# Altium PCB RasPi_Hat_Temp.PcbDoc
Units mm, origin at the board's own origin, x right, y up, seen from the top; angles counter-clockwise.
Board outline 61.34 x 65.02 mm, 2 copper layers (Top Layer, Bottom Layer), stack 0.325 mm thick; 5 components, 35 nets, 140 pads, 0 vias.
Unrouted connection lines stored in the file: 1.
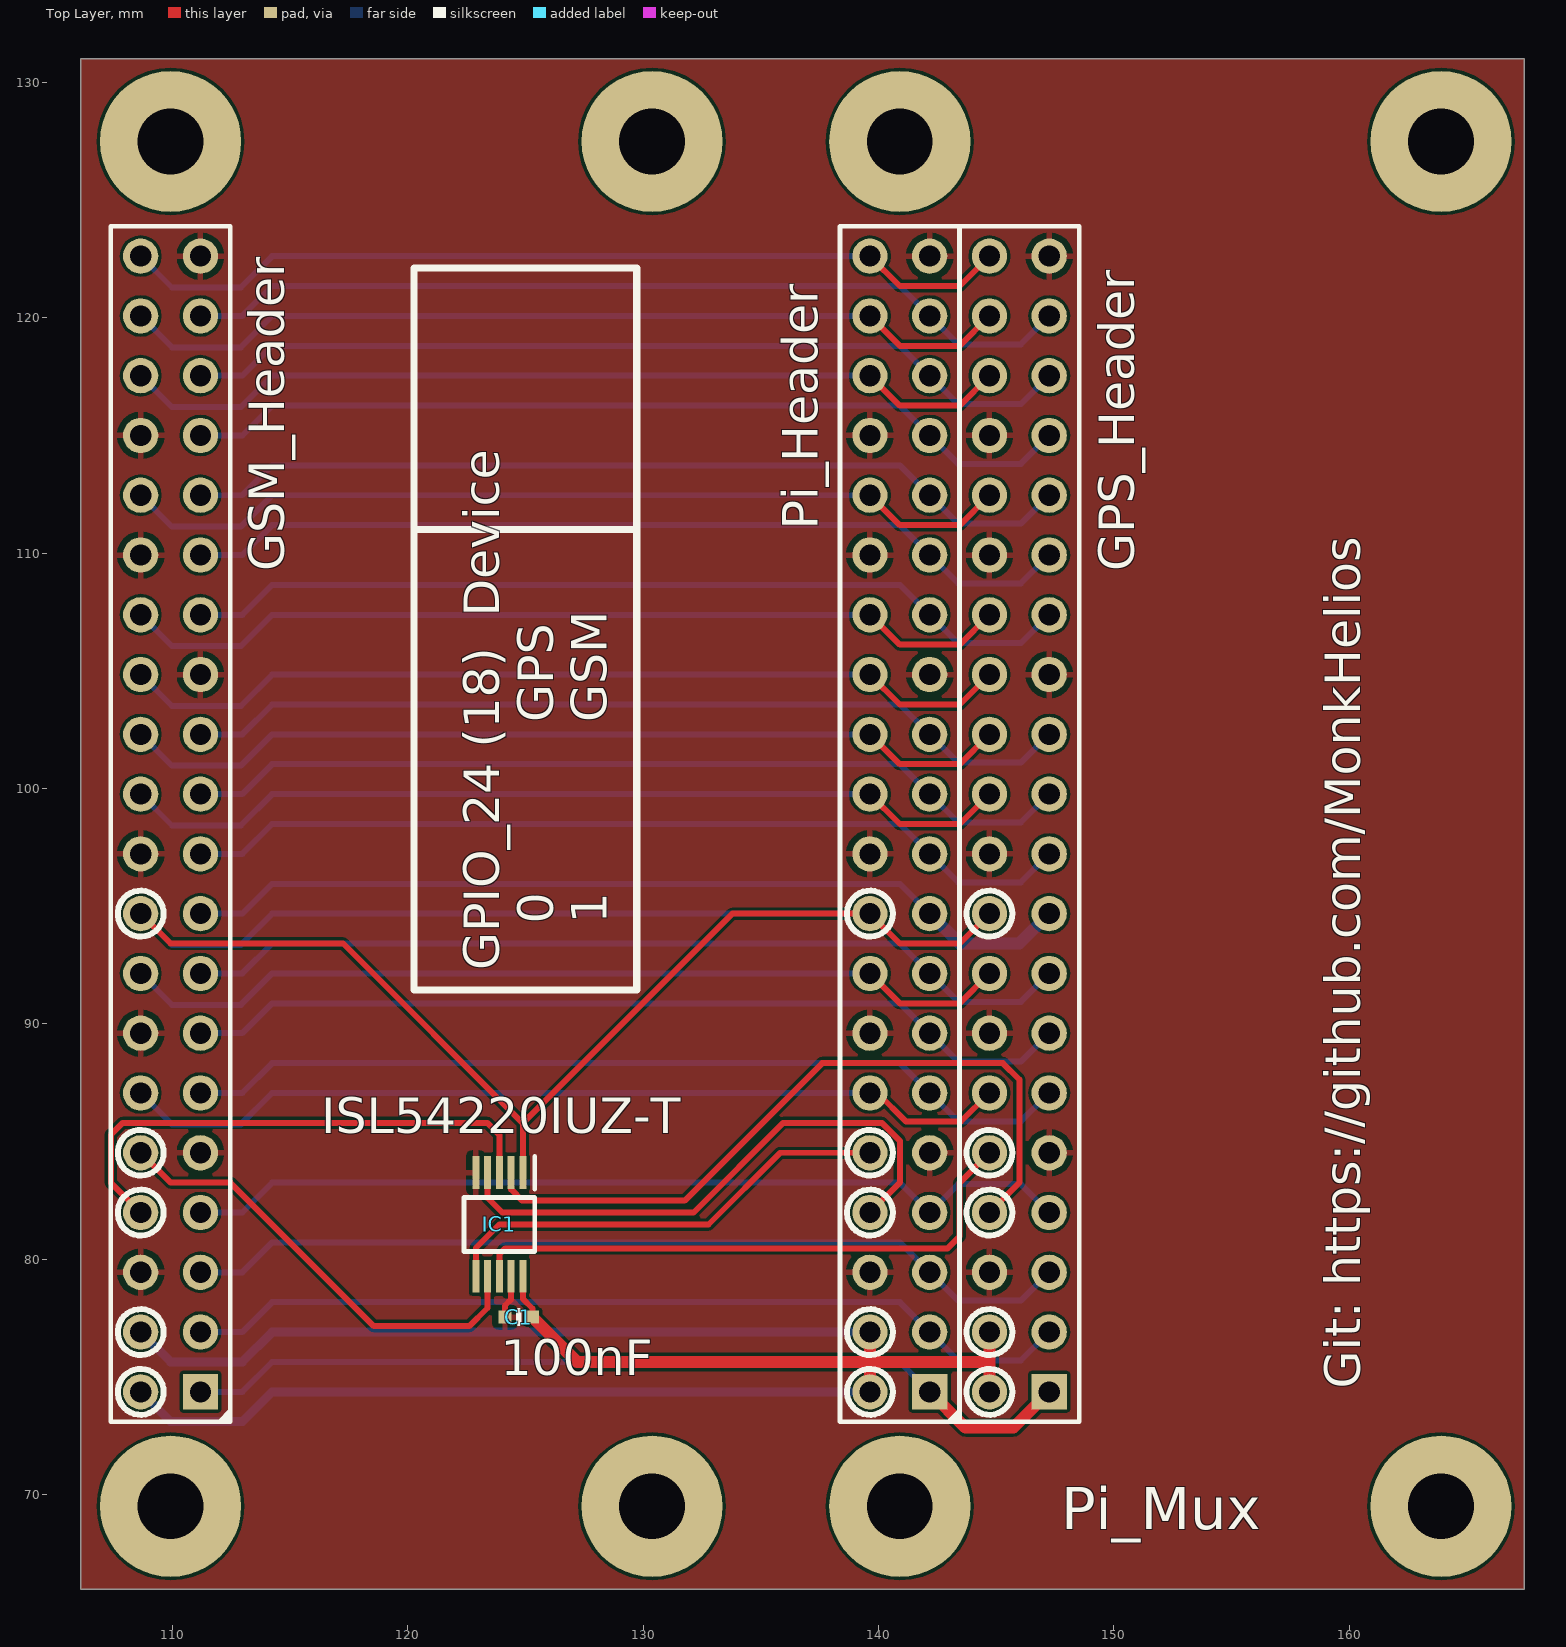
[diagram p0: Top Layer view]
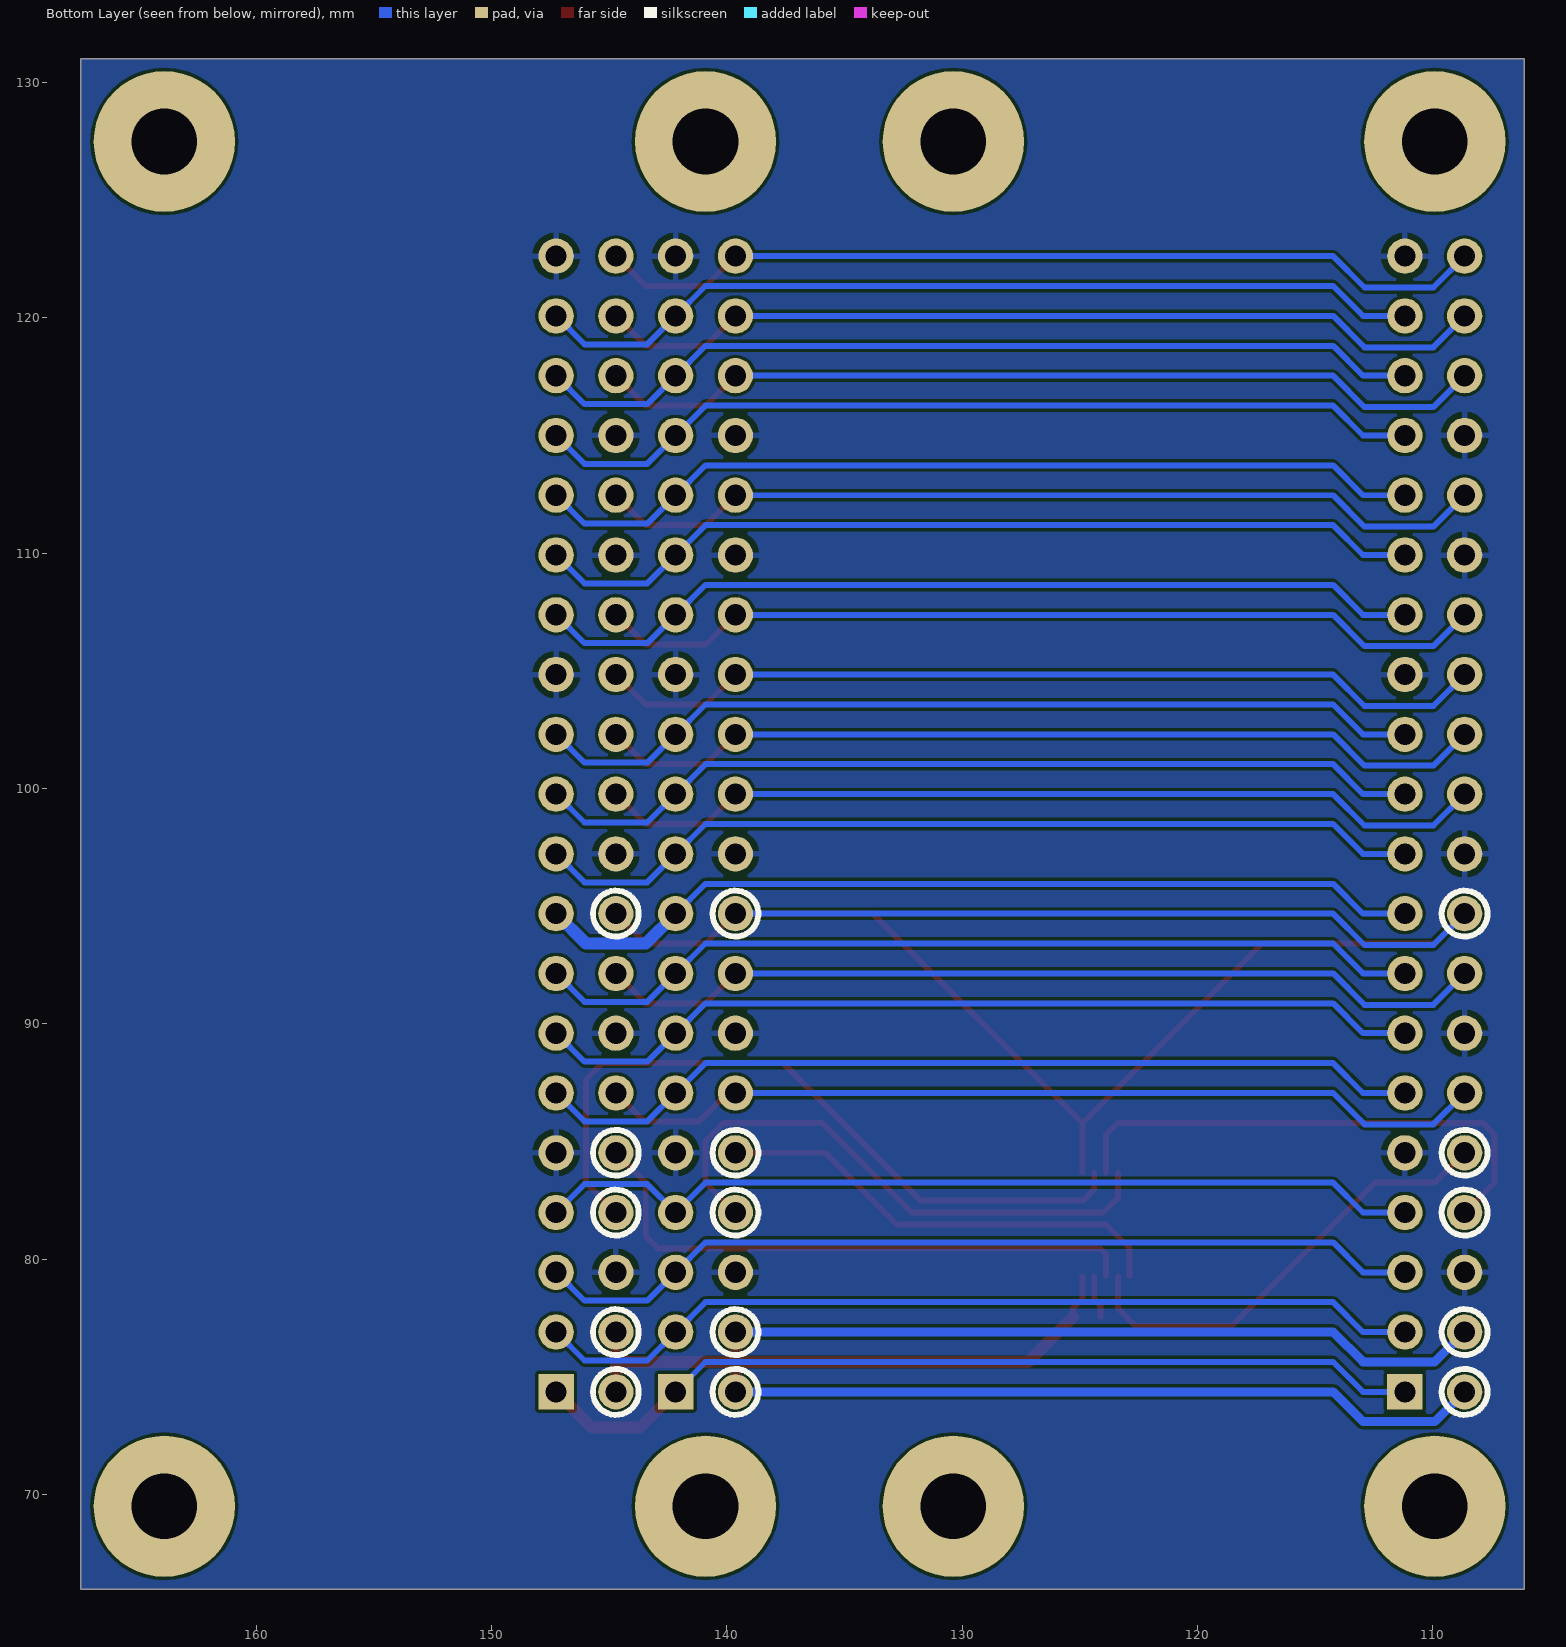
[diagram p1: Bottom Layer view, seen from below]

## Layer stack, top to bottom
Top Solder: solder mask 0.0102, Solder Resist, Dk 3.5
Top Layer: signal copper 0.0356
Dielectric 1: core 0.254, FR-4, Dk 4.2
Bottom Layer: signal copper 0.0356
Bottom Solder: solder mask 0.0102, Solder Resist, Dk 3.5

## Board outline
167.45,131 167.45,65.977 106.108,65.977 106.108,131

## Design rules (kind name [scope] priority, off if disabled: settings)
Clearance [All] p1: gap=0.127 ignorepadtopadclearanceinfootprint=FALSE
ComponentClearance [All] p1: gap=0 collisioncheckmode=3 verticalgap=0 showdistances=FALSE
PlaneConnect [All] p1: pad.planeconnectstyle=Relief pad.reliefexpansion=0.508 pad.reliefentries=4 pad.reliefconductorwidth=0.254 pad.reliefairgap=0.254 via.planeconnectstyle=Direct via.reliefexpansion=0.508 via.reliefentries=4 via.reliefconductorwidth=0.254 via.reliefairgap=0.254
PolygonConnect PolygonConnect_3 [All vs IsNamedPolygon('gnd_bottom')] p1: thpad.connectstyle=Relief thpad.reliefconductorwidth=0.254 thpad.reliefentries=4 thpad.polygonreliefangle="90 Angle" thpad.airgapwidth=0.254 smdpad.connectstyle=Direct smdpad.reliefconductorwidth=0.254 smdpad.reliefentries=4 smdpad.polygonreliefangle="90 Angle" smdpad.airgapwidth=0.254 via.connectstyle=Direct via.reliefconductorwidth=0.254 via.reliefentries=4 via.polygonreliefangle="90 Angle" via.airgapwidth=0.254
PolygonConnect PolygonConnect_2 [All vs IsNamedPolygon('gnd_top')] p2: connectstyle=Relief reliefconductorwidth=0.254 reliefentries=4 polygonreliefangle="90 Angle" airgapwidth=0.254
PolygonConnect PolygonConnect_1 [All vs IsNamedPolygon('gnd_top')] p3: thpad.connectstyle=Relief thpad.reliefconductorwidth=0.254 thpad.reliefentries=4 thpad.polygonreliefangle="90 Angle" thpad.airgapwidth=0.254 smdpad.connectstyle=Direct smdpad.reliefconductorwidth=0.254 smdpad.reliefentries=4 smdpad.polygonreliefangle="90 Angle" smdpad.airgapwidth=0.254 via.connectstyle=Direct via.reliefconductorwidth=0.254 via.reliefentries=4 via.polygonreliefangle="90 Angle" via.airgapwidth=0.254
PolygonConnect [All] p4: thpad.connectstyle=Relief thpad.reliefconductorwidth=0.254 thpad.reliefentries=4 thpad.polygonreliefangle="90 Angle" thpad.airgapwidth=0.254 smdpad.connectstyle=Relief smdpad.reliefconductorwidth=0.254 smdpad.reliefentries=4 smdpad.polygonreliefangle="90 Angle" smdpad.airgapwidth=0.254 via.connectstyle=Direct via.reliefconductorwidth=0.254 via.reliefentries=4 via.polygonreliefangle="90 Angle" via.airgapwidth=0.254
RoutingVias [All] p1: holewidth=0.711 width=1.27 viastyle="Through Hole" minholewidth=0.711 minwidth=1.27 maxholewidth=0.711 maxwidth=1.27
SolderMaskExpansion [All] p1: expansion=0.102
UnRoutedNet [All] p1: checkbadconnections=TRUE
Width [All] p1: maxlimit=1.27 minlimit=0.152 preferedwidth=0.305
27 further rules are at their usual default settings.

## Components (designator, comment, footprint, x,y, rotation, side; value= is the part's Value field where it differs from the comment)
C1 "100nF" SMD-0402C 124.714,77.534 r270 top
GPS_Header "Header 20X2" HDR2X20 147.256,74.358 r90 top
GSM_Header "Header 20X2" HDR2X20 111.188,74.358 r90 top
IC1 "ISL54220IUZ-T" SOP50P490X110-10N 123.888,81.471 r270 top
Pi_Header "Header 20X2" HDR2X20 142.177,74.358 r90 top

## Footprints (in the part's own frame and the unit in brackets; to place one, negate y for a bottom-side part, rotate by r counter-clockwise, add the part's x,y. Pads: shape width x height; smd on the part's side, far side on the other; paste and mask are expansions set on the pad)
HDR2X20 [mm] "Connector; Header; 20x2 Position"
  rect 1.5x1.5 hole 0.9: 1(0,0)
  round 1.5 hole 0.9: 2(0,2.54) 3(2.54,0) 4(2.54,2.54) 5(5.08,0) 6(5.08,2.54) 7(7.62,0) 8(7.62,2.54) 9(10.16,0) 10(10.16,2.54) 11(12.7,0) 12(12.7,2.54) 13(15.24,0) 14(15.24,2.54) 15(17.78,0) 16(17.78,2.54) 17(20.32,0) 18(20.32,2.54) 19(22.86,0) 20(22.86,2.54) 21(25.4,0) 22(25.4,2.54) 23(27.94,0) 24(27.94,2.54) 25(30.48,0) 26(30.48,2.54) 27(33.02,0) 28(33.02,2.54) 29(35.56,0) 30(35.56,2.54) 31(38.1,0) 32(38.1,2.54) 33(40.64,0) 34(40.64,2.54) 35(43.18,0) 36(43.18,2.54) 37(45.72,0) 38(45.72,2.54) 39(48.26,0) 40(48.26,2.54)
  silkscreen extent -1.27,-1.27 49.53,3.81
SMD-0402C [mm]
  rect 0.55x0.55 smd: 1(0,0.584) 2(0,-0.584)
  silkscreen extent -0.25,0 0.25,0, body extent -0.25,-0.51 0.25,0.51, height 0.51
SOP50P490X110-10N [mm]
  rect 1.4x0.3 smd: 1(-2.2,1) 2(-2.2,0.5) 3(-2.2,0) 4(-2.2,-0.5) 5(-2.2,-1) 6(2.2,-1) 7(2.2,-0.5) 8(2.2,0) 9(2.2,0.5) 10(2.2,1)
  silkscreen extent -2.9,-1.5 1.15,1.5, body extent -2.45,-1.5 2.45,1.5, height 1.1

## Part data
C1: library part GCM155C71A105KE38D, "CAP CER 1UF 10V X7S 0402", Digi-Key Part Number=490-13409-1-ND, Manufacturer="Murata Electronics North America", Operating Temperature="-55°C ~ 125°C", Package / Case="0402 (1005 Metric)", Ratings=AEC-Q200, Temperature Coefficient=X7S, Tolerance=±10%, Voltage=10V, @ qty=0, Applications=Automotive, Datasheets=http://www.murata.com/~/media/webrenewal/support/library/catalog/products/capacitor/mlcc/c03e.ashx, Factory Stock=0, Features=-, Height - Seated (Max)=-, Image=//media.digikey.com/Renders/Murata%20Renders/ZRB-SERIES-0402.jpg, Lead Spacing=-, Lead Style=-, Minimum Quantity=1, Mounting Type="Surface Mount, MLCC", Packaging="Cut Tape (CT)", Part Number=GCM155C71A105KE38D, Part Status=Active, Quantity Available=7240, Series=GCM, Size / Dimension="0.039\" L x 0.020\" W (1.00mm x 0.50mm)", Thickness (Max)="0.022\" (0.55mm)", Unit Price (USD)=0.12
GPS_Header GSM_Header Pi_Header: "Header, 20-Pin, Dual row", LatestRevisionDate=17-Jul-2002, LatestRevisionNote="Re-released for DXP Platform.", Publisher="Altium Limited"
IC1: "Integrated Circuit", Manufacturer_Name="Renesas / Intersil", Mouser Part Number=968-ISL54220IUZ-T, Datasheet Link=https://www.renesas.com/kr/en/www/doc/datasheet/isl54220.pdf, Height=1.1mm, Manufacturer_Part_Number=ISL54220IUZ-T, Mouser Price/Stock=https://www.mouser.com/Search/Refine.aspx?Keyword=968-ISL54220IUZ-T

## Free pads (board coordinates)
  round 6 hole 2.794 unplated: 77(109.918,69.495) 77(140.906,69.495) 78(109.918,127.49) 78(140.906,127.49) 79(130.378,127.49) 79(163.906,127.49) 80(130.378,69.495) 80(163.906,69.495)

## Nets (pads, with @x,y where several pads share a name; then routed paths per layer and width w, separated by ;. In a path a pad name is that pad's centre, name@x,y a point inside that pad or via, vN(x,y) a via of type N, cw(c..) or ccw(c..) an arc to the next point about the centre after c; other vN are vias at no path point)
3: GPS_Header.3 GSM_Header.3 Pi_Header.3 | length 38.1
  Bottom Layer w0.254: GSM_Header.3 112.966,76.898 114.236,78.168 140.906,78.168 Pi_Header.3 143.383,75.692 146.05,75.692 GPS_Header.3
3V3: GPS_Header.1 GPS_Header.17 GSM_Header.1 GSM_Header.17 Pi_Header.1 Pi_Header.17 | length 76.6
  Top Layer w0.508: Pi_Header.1 143.701,72.834 145.732,72.834 GPS_Header.1
  Bottom Layer w0.254: GSM_Header.1 112.966,74.358 114.236,75.629 140.906,75.629 Pi_Header.1 ; GSM_Header.17 112.966,94.678 114.236,95.948 140.906,95.948 Pi_Header.17
  Bottom Layer w0.508: Pi_Header.17 143.446,93.408 145.987,93.408 GPS_Header.17
5: GPS_Header.5 GSM_Header.5 Pi_Header.5 | length 38.1
  Bottom Layer w0.254: GSM_Header.5 112.966,79.438 114.236,80.709 140.906,80.709 Pi_Header.5 143.383,78.232 146.05,78.232 GPS_Header.5
5V: C1.1 GPS_Header.2 GPS_Header.4 GSM_Header.2 GSM_Header.4 IC1.10 Pi_Header.2 Pi_Header.4 | length 91.3
  Top Layer w0.254: IC1.10 124.889,78.311 125.298,77.902 C1.1
  Top Layer w0.508: C1.1 125.298,77.521 127.191,75.629 139.636,75.629 ; Pi_Header.2 139.636,75.629 ; Pi_Header.4 139.636,75.629 ; GPS_Header.2 144.716,75.629 ; GPS_Header.4 144.716,75.629 ; 139.636,75.629 144.716,75.629
  Bottom Layer w0.381: GSM_Header.2 109.918,73.088 112.966,73.088 114.236,74.358 Pi_Header.2 ; GSM_Header.4 109.918,75.629 112.966,75.629 114.236,76.898 Pi_Header.4
7: GPS_Header.7 GSM_Header.7 Pi_Header.7 | length 38.1
  Bottom Layer w0.254: GSM_Header.7 112.966,81.978 114.236,83.248 140.906,83.248 Pi_Header.7 143.383,83.185 146.05,83.185 GPS_Header.7
11: GPS_Header.11 GSM_Header.11 Pi_Header.11 | length 38.1
  Bottom Layer w0.254: GSM_Header.11 112.966,87.058 114.236,88.328 140.906,88.328 Pi_Header.11 143.383,85.852 146.05,85.852 GPS_Header.11
12: GPS_Header.12 GSM_Header.12 Pi_Header.12 | length 38.2
  Top Layer w0.254: Pi_Header.12 139.96,87.058 141.167,85.852 143.51,85.852 GPS_Header.12
  Bottom Layer w0.254: GSM_Header.12 109.982,85.725 112.903,85.725 114.236,87.058 Pi_Header.12
13: GPS_Header.13 GSM_Header.13 Pi_Header.13 | length 38.1
  Bottom Layer w0.254: GSM_Header.13 112.966,89.599 114.236,90.868 140.906,90.868 Pi_Header.13 143.383,88.392 146.05,88.392 GPS_Header.13
15: GPS_Header.15 GSM_Header.15 Pi_Header.15 | length 38.1
  Bottom Layer w0.254: GSM_Header.15 112.966,92.138 114.236,93.408 140.906,93.408 Pi_Header.15 143.383,90.932 146.05,90.932 GPS_Header.15
16: GPS_Header.16 GSM_Header.16 Pi_Header.16 | length 38.2
  Top Layer w0.254: Pi_Header.16 140.906,90.868 143.446,90.868 GPS_Header.16
  Bottom Layer w0.254: GSM_Header.16 109.982,90.805 112.903,90.805 114.236,92.138 Pi_Header.16
18: GPS_Header.18 GSM_Header.18 IC1.1 Pi_Header.18 | length 78.7
  Top Layer w0.254: GSM_Header.18 109.918,93.408 117.253,93.408 124.889,85.773 ; IC1.1 124.889,85.773 ; GPS_Header.18 143.446,93.408 140.906,93.408 Pi_Header.18 133.794,94.678 124.889,85.773
  Bottom Layer w0.254: GSM_Header.18 109.982,93.345 112.903,93.345 114.236,94.678 Pi_Header.18
19: GPS_Header.19 GSM_Header.19 Pi_Header.19 | length 38.1
  Bottom Layer w0.254: GSM_Header.19 112.966,97.218 114.236,98.489 140.906,98.489 Pi_Header.19 143.383,96.012 146.05,96.012 GPS_Header.19
21: GPS_Header.21 GSM_Header.21 Pi_Header.21 | length 38.1
  Bottom Layer w0.254: GSM_Header.21 112.966,99.758 114.236,101.028 140.906,101.028 Pi_Header.21 143.383,98.552 146.05,98.552 GPS_Header.21
22: GPS_Header.22 GSM_Header.22 Pi_Header.22 | length 38.2
  Top Layer w0.254: Pi_Header.22 140.906,98.489 143.446,98.489 GPS_Header.22
  Bottom Layer w0.254: GSM_Header.22 109.982,98.425 112.903,98.425 114.236,99.758 Pi_Header.22
23: GPS_Header.23 GSM_Header.23 Pi_Header.23 | length 38.1
  Bottom Layer w0.254: GSM_Header.23 112.966,102.298 114.236,103.569 140.906,103.569 Pi_Header.23 143.383,101.092 146.05,101.092 GPS_Header.23
24: GPS_Header.24 GSM_Header.24 Pi_Header.24 | length 38.2
  Top Layer w0.254: Pi_Header.24 140.906,101.028 143.446,101.028 GPS_Header.24
  Bottom Layer w0.254: GSM_Header.24 109.982,100.965 112.903,100.965 114.236,102.298 Pi_Header.24
26: GPS_Header.26 GSM_Header.26 Pi_Header.26 | length 38.2
  Top Layer w0.254: Pi_Header.26 140.906,103.569 143.446,103.569 GPS_Header.26
  Bottom Layer w0.254: GSM_Header.26 109.982,103.505 112.903,103.505 114.236,104.838 Pi_Header.26
27: GPS_Header.27 GSM_Header.27 Pi_Header.27 | length 38.1
  Bottom Layer w0.254: GSM_Header.27 112.966,107.379 114.236,108.648 140.906,108.648 Pi_Header.27 143.383,106.172 146.05,106.172 GPS_Header.27
28: GPS_Header.28 GSM_Header.28 Pi_Header.28 | length 38.2
  Top Layer w0.254: Pi_Header.28 140.906,106.108 143.446,106.108 GPS_Header.28
  Bottom Layer w0.254: GSM_Header.28 109.982,106.045 112.903,106.045 114.236,107.379 Pi_Header.28
29: GPS_Header.29 GSM_Header.29 Pi_Header.29 | length 38.1
  Bottom Layer w0.254: GSM_Header.29 112.966,109.918 114.236,111.188 140.906,111.188 Pi_Header.29 143.383,108.712 146.05,108.712 GPS_Header.29
31: GPS_Header.31 GSM_Header.31 Pi_Header.31 | length 38.1
  Bottom Layer w0.254: GSM_Header.31 112.966,112.459 114.236,113.728 140.906,113.728 Pi_Header.31 143.383,111.252 146.05,111.252 GPS_Header.31
32: GPS_Header.32 GSM_Header.32 Pi_Header.32 | length 38.2
  Top Layer w0.254: Pi_Header.32 140.906,111.188 143.446,111.188 GPS_Header.32
  Bottom Layer w0.254: GSM_Header.32 109.982,111.125 112.903,111.125 114.236,112.459 Pi_Header.32
33: GPS_Header.33 GSM_Header.33 Pi_Header.33 | length 38.1
  Bottom Layer w0.254: GSM_Header.33 112.966,114.998 114.236,116.268 140.906,116.268 Pi_Header.33 143.383,113.792 146.05,113.792 GPS_Header.33
35: GPS_Header.35 GSM_Header.35 Pi_Header.35 | length 38.1
  Bottom Layer w0.254: GSM_Header.35 112.966,117.538 114.236,118.808 140.906,118.808 Pi_Header.35 143.383,116.332 146.05,116.332 GPS_Header.35
36: GPS_Header.36 GSM_Header.36 Pi_Header.36 | length 38.2
  Top Layer w0.254: Pi_Header.36 140.906,116.268 143.446,116.268 GPS_Header.36
  Bottom Layer w0.254: GSM_Header.36 109.982,116.205 112.903,116.205 114.236,117.538 Pi_Header.36
37: GPS_Header.37 GSM_Header.37 Pi_Header.37 | length 38.1
  Bottom Layer w0.254: GSM_Header.37 112.966,120.078 114.236,121.349 140.906,121.349 Pi_Header.37 143.383,118.872 146.05,118.872 GPS_Header.37
38: GPS_Header.38 GSM_Header.38 Pi_Header.38 | length 38.2
  Top Layer w0.254: Pi_Header.38 140.906,118.808 143.446,118.808 GPS_Header.38
  Bottom Layer w0.254: GSM_Header.38 109.982,118.745 112.903,118.745 114.236,120.078 Pi_Header.38
40: GPS_Header.40 GSM_Header.40 Pi_Header.40 | length 38.2
  Top Layer w0.254: Pi_Header.40 140.906,121.349 143.446,121.349 GPS_Header.40
  Bottom Layer w0.254: GSM_Header.40 109.982,121.285 112.903,121.285 114.236,122.618 Pi_Header.40
GND: C1.2 GPS_Header.6 GPS_Header.9 GPS_Header.14 GPS_Header.20 GPS_Header.25 GPS_Header.30 GPS_Header.34 GPS_Header.39 GSM_Header.6 GSM_Header.9 GSM_Header.14 GSM_Header.20 GSM_Header.25 GSM_Header.30 GSM_Header.34 GSM_Header.39 IC1.5 IC1.9 Pi_Header.6 Pi_Header.9 Pi_Header.14 Pi_Header.20 Pi_Header.25 Pi_Header.30 Pi_Header.34 Pi_Header.39 | length 1.8
  Top Layer w0.254: C1.2 124.13,78.029 124.388,78.287 IC1.9
GPS_RX: GPS_Header.8 IC1.2 | length 31.4
  Top Layer w0.254: IC1.2 124.388,82.961 124.863,82.486 131.762,82.486 137.605,88.328 145.288,88.328 145.987,87.63 145.987,83.248 GPS_Header.8
GPS_TX: GPS_Header.10 IC1.8 | length 24.9
  Top Layer w0.254: IC1.8 123.888,80.2 124.142,80.454 142.939,80.454 143.446,80.962 143.446,83.248 GPS_Header.10
GSM_RX: GSM_Header.8 IC1.3 | length 22.4
  Top Layer w0.254: GSM_Header.8 107.379,83.248 107.379,85.281 107.886,85.788 123.38,85.788 123.888,85.281 IC1.3
GSM_TX: GSM_Header.10 IC1.7 | length 19.5
  Top Layer w0.254: GSM_Header.10 109.918,83.248 112.459,83.248 118.554,77.153 122.618,77.153 123.389,77.923 IC1.7
Pi_RX: IC1.6 Pi_Header.10 | length 19.6
  Top Layer w0.254: IC1.6 122.888,80.47 123.888,81.471 132.779,81.471 135.826,84.519 Pi_Header.10
Pi_TX: IC1.4 Pi_Header.8 | length 24.3
  Top Layer w0.254: IC1.4 123.389,82.605 124.015,81.978 132.143,81.978 135.953,85.788 140.144,85.788 140.906,85.026 140.906,83.248 Pi_Header.8

## Polygon pours and split planes (outlines as drawn)
GND on Top Layer "gnd_top" (solid, pour order 0): 167.45,131 106.108,131 106.108,65.977 167.45,65.977
GND on Bottom Layer "gnd_bottom" (solid, pour order 2): 167.45,131 106.108,131 106.108,65.977 167.45,65.977

## Silkscreen, mask and mechanical layers (free items; w line width, h text height)
Top Overlay:
  circle w0.254: c108.648,94.678 r0.975
  circle w0.254: c108.648,84.519 r0.975
  circle w0.254: c108.648,81.978 r0.975
  circle w0.254: c139.636,94.678 r0.975
  circle w0.254: c139.636,84.519 r0.975
  circle w0.254: c139.636,81.978 r0.975
  circle w0.254: c139.636,76.898 r0.975
  circle w0.254: c139.636,74.358 r0.975
  circle w0.254: c144.716,76.898 r0.975
  circle w0.254: c144.716,74.358 r0.975
  circle w0.254: c144.716,81.978 r0.975
  circle w0.254: c144.716,84.519 r0.975
  circle w0.254: c144.716,94.678 r0.975
  circle w0.254: c108.648,76.898 r0.975
  circle w0.254: c108.648,74.358 r0.975
  lines w0.127: 111.95,73.088 112.459,73.596 ; 112.459,73.088 112.204,73.343 ; 142.939,73.088 143.446,73.596 ; 143.192,73.088 143.192,73.343 ; 112.204,73.343 112.459,73.343 112.204,73.088 112.204,73.343 ; 143.192,73.343 143.446,73.343 143.446,73.088 143.192,73.343
  lines w0.305: 120.269,110.998 129.731,110.998 ; 120.269,91.44 129.731,91.44 129.731,122.111 120.269,122.111 120.269,91.44
  text "GPIO_24 (18)  Device /    0           GPS /    1           GSM" at 128.46,92.266 h1.52 r90
  text "Git: https://github.com/MonkHelios" at 160.464,74.486 h1.52 r90
  text "Pi_Mux" at 147.764,68.516 h1.78
Bottom Overlay:
  circle w0.254: c108.648,74.358 r0.975
  circle w0.254: c108.648,76.898 r0.975
  circle w0.254: c108.648,81.978 r0.975
  circle w0.254: c108.648,84.519 r0.975
  circle w0.254: c108.648,94.678 r0.975
  circle w0.254: c139.636,94.678 r0.975
  circle w0.254: c144.716,94.678 r0.975
  circle w0.254: c139.636,84.519 r0.975
  circle w0.254: c144.716,84.519 r0.975
  circle w0.254: c139.636,81.978 r0.975
  circle w0.254: c144.716,81.978 r0.975
  circle w0.254: c139.636,76.898 r0.975
  circle w0.254: c139.636,74.358 r0.975
  circle w0.254: c144.716,76.898 r0.975
  circle w0.254: c144.716,74.358 r0.975
Board Outline:
  lines w0.254: 106.085,132.27 106.085,132.779 ; 107.609,132.017 106.085,132.524 ; 107.609,133.032 106.085,132.524 ; 128.986,132.524 106.085,132.524 ; 144.526,132.524 167.426,132.524 ; 165.902,132.017 167.426,132.524 ; 165.902,133.032 167.426,132.524 ; 167.426,132.27 167.426,132.779 ; 168.465,67.501 168.974,65.977 ; 168.465,129.476 168.974,131 ; 168.719,65.977 169.227,65.977 ; 168.719,131 169.227,131 ; 168.974,90.465 168.974,65.977 ; 168.974,106.512 168.974,131 ; 169.481,67.501 168.974,65.977 ; 169.481,129.476 168.974,131
  text "61.341 (mm)" at 129.24,131.61 h1.52
  text "65.024 (mm)" at 169.888,90.719 h1.52 r90